# Altium PCB PCB1.PcbDoc
Units mil, origin at the board's own origin, x right, y up, seen from the top; angles counter-clockwise.
Board outline 1968.5 x 2559.06 mil, 6 copper layers (Top Layer, Gnd, Signal_1, Signal_2, Power, Bottom Layer), stack 32.112 mil thick; 113 components, 62 nets, 306 pads, 0 vias.
Unrouted connection lines stored in the file: 217.
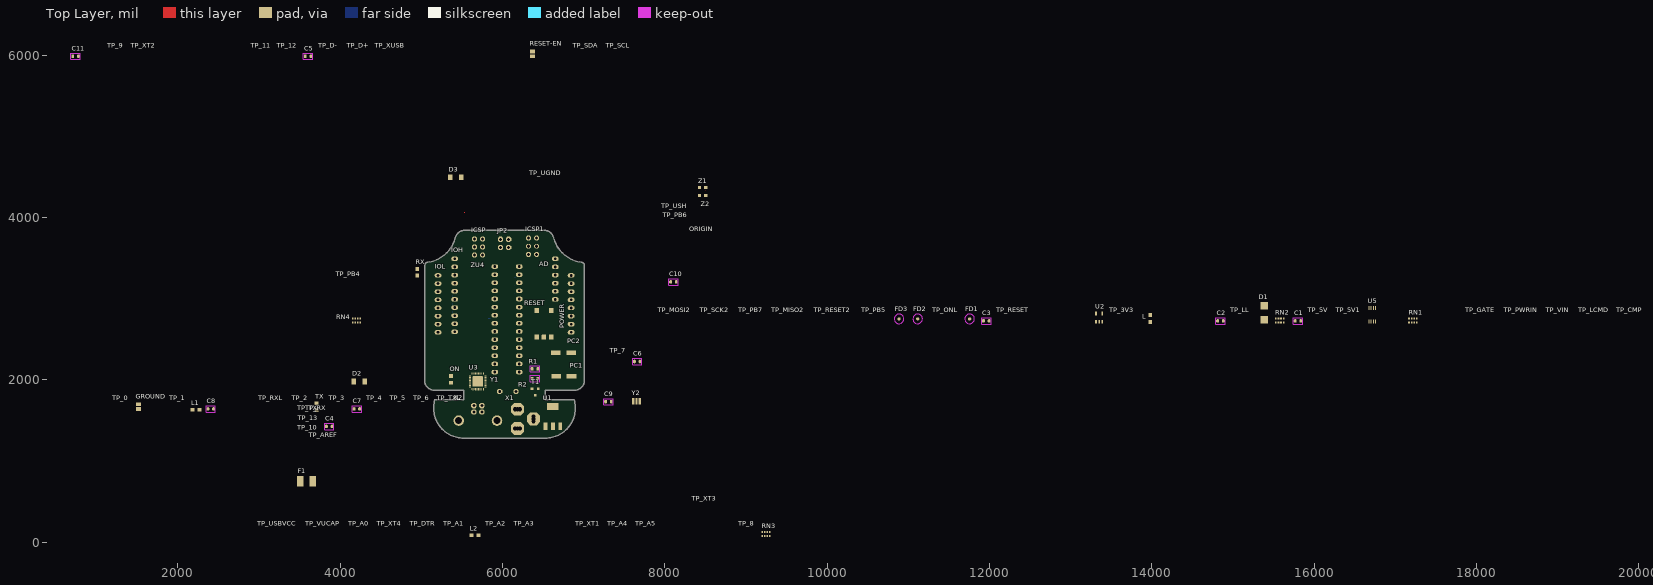
[diagram p0: Top Layer view]
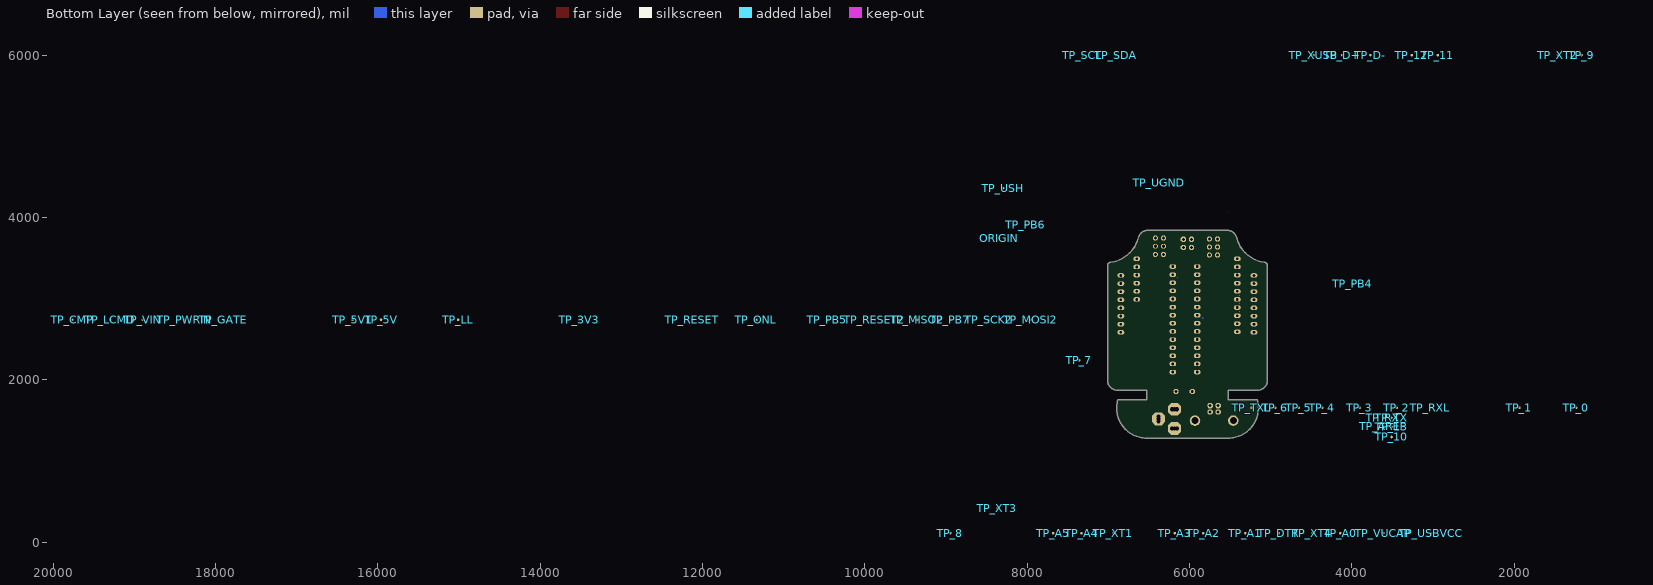
[diagram p1: Bottom Layer view, seen from below]
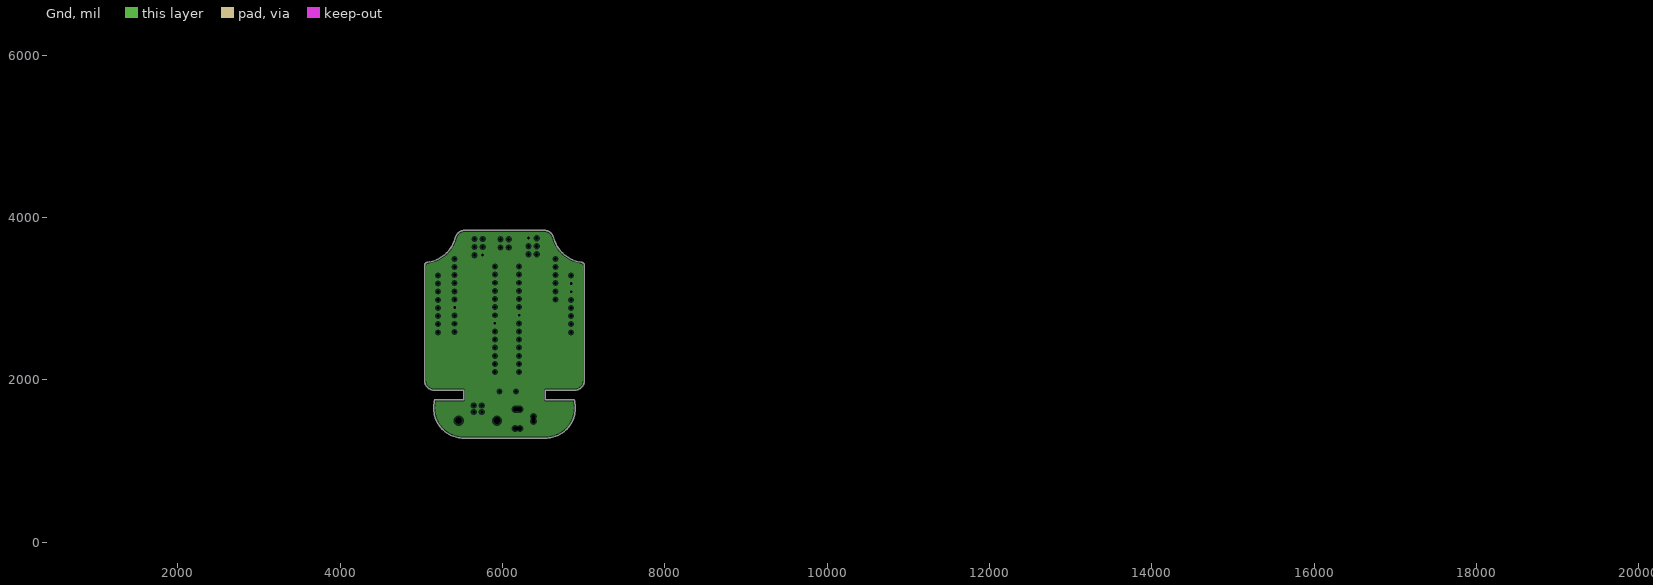
[diagram p2: Gnd, clearances drawn from the general rule]
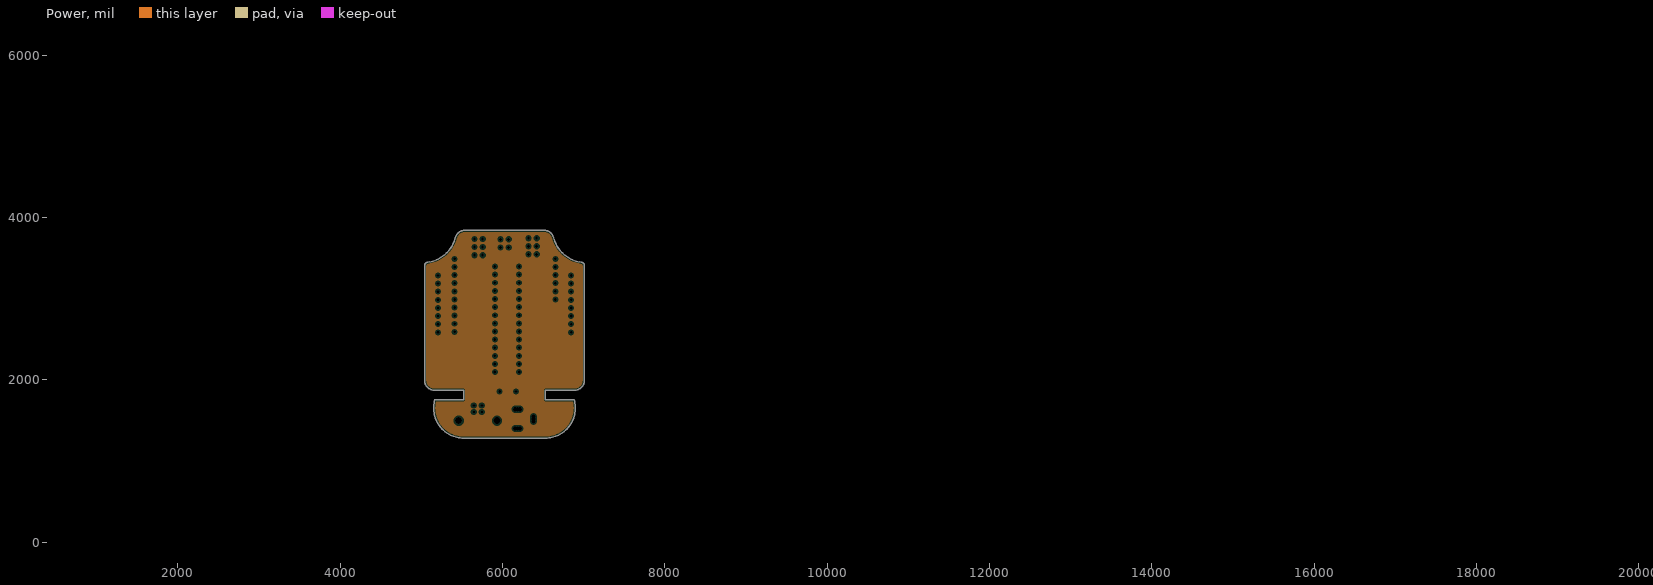
[diagram p3: Power, clearances drawn from the general rule]

## Layer stack, top to bottom
Top Solder: solder mask 0.4, Solder Resist, Dk 3.5
Top Layer: signal copper 1.4
Dielectric 2: prepreg 2.8, PP-006, Dk 4.1
Gnd: plane copper 1.378, net GND
Dielectric 4: prepreg 2.8, PP-006, Dk 4.1
Signal_1: signal copper 1.378
Dielectric 1: dielectric 12.6, FR-4, Dk 4.8
Signal_2: signal copper 1.378
Dielectric 5: prepreg 2.8, PP-006, Dk 4.1
Power: plane copper 1.378
Dielectric 3: prepreg 2.8, PP-006, Dk 4.1
Bottom Layer: signal copper 1.4
Bottom Solder: solder mask 0.4, Solder Resist, Dk 3.5

## Board outline
5519.83,1754.15 5519.83,1872.26 5157.97,1872.26 cw(c5157.97,1990.37) 5039.86,1990.37 5039.86,3407.69 cw(c5079.23,3407.69) 5079.23,3447.06 ccw(c5017.47,3858.94) 5420.19,3752.76 cw(c5534.4,3722.65) 5534.4,3840.76 6513.82,3840.76 cw(c6513.82,3722.65) 6628.02,3752.76 ccw(c7030.75,3858.94) 6968.99,3447.06 cw(c6968.99,3407.69) 7008.36,3407.69 7008.36,1990.37 cw(c6890.25,1990.37) 6890.25,1872.26 6528.39,1872.26 6528.39,1754.15 6882.72,1754.15 cw(c6528.39,1650.8) 6528.39,1281.71 5519.83,1281.71 cw(c5519.83,1650.8) 5165.5,1754.15

## Design rules (kind name [scope] priority, off if disabled: settings)
Clearance [All] p1 off: gap=10 ignorepadtopadclearanceinfootprint=FALSE
PlaneClearance [All] p1: clearance=20
PlaneConnect [All] p1: planeconnectstyle=Relief reliefexpansion=20 reliefentries=4 reliefconductorwidth=10 reliefairgap=10
PolygonConnect [All] p1: connectstyle=Relief reliefconductorwidth=10 reliefentries=4 polygonreliefangle="90 Angle" airgapwidth=10
RoutingVias [All] p1: holewidth=28 width=50 viastyle="Through Hole" minholewidth=28 minwidth=50 maxholewidth=28 maxwidth=50
SolderMaskExpansion [All] p1: expansion=4 istentingtop=FALSE
SupplyNets "Schematic Supply Nets_1" [InNet('+5V')] p1: voltage=0.000
SupplyNets "Schematic Supply Nets" [InNet('GND')] p2: voltage=0.000
Width [All] p1: maxlimit=10 minlimit=10 preferedwidth=10
28 further rules are at their usual default settings.

## Components (designator, comment, footprint, x,y, rotation, side; value= is the part's Value field where it differs from the comment)
AD "6x1F-H8.5" 1X06 6650,3240 r270 top
C1 "100n" C0603-ROUND 15800,2725 r0 top
C2 "100n" C0603-ROUND 14845,2725 r0 top
C3 "1u" C0603-ROUND 11960,2725 r0 top
C4 "100n" C0603-ROUND 3865,1425 r180 top
C5 "100n" C0603-ROUND 3605,5985 r0 top
C6 "100n" C0603-ROUND 7660,2225 r0 top
C7 "100n" C0603-ROUND 4205,1640 r0 top
C8 "1u" C0603-ROUND 2405,1640 r0 top
C9 "22p" C0603-ROUND 7305,1730 r0 top
C10 "100n" C0603-ROUND 8105,3205 r0 top
C11 "22p" C0603-ROUND 740,5985 r0 top
D1 "M7" SMB 15385,2825 r90 top
D2 "CD1206-S01575" MINIMELF 4235,1980 r0 top
D3 "CD1206-S01575" MINIMELF 5425,4495 r0 top
F1 "MF-MSMF050-2 500mA" L1812 3585,750 r0 top
FD1 "FIDUCIALMOUNT" FIDUCIA-MOUNT 11755,2750 r0 top
FD2 "FIDUCIALMOUNT" FIDUCIA-MOUNT 11115,2750 r0 top
FD3 "FIDUCIALMOUNT" FIDUCIA-MOUNT 10885,2750 r0 top
GROUND "SJ" SJ 1515,1670 r90 top
ICSP "3x2 M" 2X03 5705,3635 r270 top
ICSP1 "3x2 M" 2X03 6370,3645 r90 top
IOH "10x1F-H8.5" 1X10 5410,3040 r270 top
IOL "8x1F-H8.5" 1X08 5205,2935 r90 top
JP2 "2x2 M - NM" 2X02 6025,3680 r0 top
L "YELLOW" CHIP-LED0805 13980,2755 r0 top
L1 "BLM21" 0805 2225,1630 r0 top
L2 "10uH" 0805 5660,85 r0 top
ON "GREEN" CHIP-LED0805 5365,2005 r0 top
ORIGIN "TP_SP" TP-SP 8341.63,3745.71 r90 top
PC1 "47u" PANASONIC_D 6755,2045 r0 top
PC2 "47u" PANASONIC_D 6750,2330 r0 top
POWER "8x1F-H8.5" 1X08 6845,2935 r90 top
R1 "1M" R0603-ROUND 6400,2135 r0 top
R2 "1M" R0603-ROUND 6400,2015 r0 top
RESET "TS42031-160R-TR-7260" TS42 6510,2690 r90 top
RESET-EN "SJ" SJ 6370,6015 r90 top
RN1 "10K" CAY16 17215,2730 r0 top
RN2 "1K" CAY16 15575,2730 r0 top
RN3 "22R" CAY16 9245,100 r0 top
RN4 "1K" CAY16 4200,2730 r0 top
RX "YELLOW" CHIP-LED0805 4950,3325 r0 top
T1 "FDN340P" SOT-23 6400,1850 r0 top
TP_0 "TP_SP" TP-SP 1235,1655 r90 top
TP_1 "TP_SP" TP-SP 1935,1655 r90 top
TP_2 "TP_SP" TP-SP 3445,1655 r90 top
TP_3 "TP_SP" TP-SP 3905,1655 r90 top
TP_3V3 "TP_SP" TP-SP 13515,2740 r90 top
TP_4 "TP_SP" TP-SP 4365,1655 r90 top
TP_5 "TP_SP" TP-SP 4655,1655 r90 top
TP_5V "TP_SP" TP-SP 15960,2740 r90 top
TP_5V1 "TP_SP" TP-SP 16310,2740 r90 top
TP_6 "TP_SP" TP-SP 4945,1655 r90 top
TP_7 "TP_SP" TP-SP 7360,2240 r90 top
TP_8 "TP_SP" TP-SP 8945,110 r90 top
TP_9 "TP_SP" TP-SP 1170,6000 r90 top
TP_10 "TP_SP" TP-SP 3510,1295 r90 top
TP_11 "TP_SP" TP-SP 2940,6000 r90 top
TP_12 "TP_SP" TP-SP 3260,6000 r90 top
TP_13 "TP_SP" TP-SP 3510,1420 r90 top
TP_A0 "TP_SP" TP-SP 4140,110 r90 top
TP_A1 "TP_SP" TP-SP 5310,110 r90 top
TP_A2 "TP_SP" TP-SP 5830,110 r90 top
TP_A3 "TP_SP" TP-SP 6180,110 r90 top
TP_A4 "TP_SP" TP-SP 7330,110 r90 top
TP_A5 "TP_SP" TP-SP 7680,110 r90 top
TP_AREF "TP_SP" TP-SP 3610,1425 r90 top
TP_CMP "TP_SP" TP-SP 19765,2740 r90 top
TP_D+ "TP_SP" TP-SP 4120,6000 r90 top
TP_D- "TP_SP" TP-SP 3770,6000 r90 top
TP_DTR "TP_SP" TP-SP 4900,110 r90 top
TP_GATE "TP_SP" TP-SP 17905,2740 r90 top
TP_LCMD "TP_SP" TP-SP 19295,2740 r90 top
TP_LL "TP_SP" TP-SP 15010,2740 r90 top
TP_MISO2 "TP_SP" TP-SP 9355,2740 r90 top
TP_MOSI2 "TP_SP" TP-SP 7955,2740 r90 top
TP_ONL "TP_SP" TP-SP 11335,2740 r90 top
TP_PB4 "TP_SP" TP-SP 3990,3185 r90 top
TP_PB5 "TP_SP" TP-SP 10460,2740 r90 top
TP_PB6 "TP_SP" TP-SP 8014,3910.09 r90 top
TP_PB7 "TP_SP" TP-SP 8945,2740 r90 top
TP_PWRIN "TP_SP" TP-SP 18375,2740 r90 top
TP_RESET "TP_SP" TP-SP 12125,2740 r90 top
TP_RESET2 "TP_SP" TP-SP 9875,2740 r90 top
TP_RX "TP_SP" TP-SP 3610,1530 r90 top
TP_RXL "TP_SP" TP-SP 3035,1655 r90 top
TP_SCK2 "TP_SP" TP-SP 8475,2740 r90 top
TP_SCL "TP_SP" TP-SP 7315,6000 r90 top
TP_SDA "TP_SP" TP-SP 6905,6000 r90 top
TP_TX "TP_SP" TP-SP 3510,1530 r90 top
TP_TXL "TP_SP" TP-SP 5235,1655 r90 top
TP_UGND "TP_SP" TP-SP 6375,4430 r90 top
TP_USBVCC "TP_SP" TP-SP 3020,110 r90 top
TP_USH "TP_SP" TP-SP 8295,4360 r90 top
TP_VIN "TP_SP" TP-SP 18895,2740 r90 top
TP_VUCAP "TP_SP" TP-SP 3610,110 r90 top
TP_XT1 "TP_SP" TP-SP 6940,110 r90 top
TP_XT2 "TP_SP" TP-SP 1460,6000 r90 top
TP_XT3 "TP_SP" TP-SP 8370,415 r90 top
TP_XT4 "TP_SP" TP-SP 4490,110 r90 top
TP_XUSB "TP_SP" TP-SP 4470,6000 r90 top
TX "YELLOW" CHIP-LED0805 3710,1670 r0 top
U1 "NCP1117ST50T3G" SOT223 6620,1550 r0 top
U2 "LP2985-33DBVR" SOT23-DBV 13350,2765 r0 top
U3 "ATMEGA16U2-MU(R)" MLF32 5695,1980 r0 top
U5 "LMV358IDGKR" MSOP08 16715,2800 r0 top
X1 "POWERSUPPLY_DC21MMX" POWERSUPPLY_DC-21MM 6182,1386 r180 top
X2 "USB-B_TH" PN61729 5695.79,1496.61 r0 top
Y1 "16MHz" QS 6065,1855 r180 top
Y2 "CSTCE16M0V53-R0 16MHZ" RESONATOR 7650,1735 r0 top
Z1 "CG0603MLC-05E" CT/CN0603 8465,4370 r180 top
Z2 "CG0603MLC-05E" CT/CN0603 8464.37,4270 r180 top
ZU4 "ATMEGA328P-PU" DIL28-3 6055,2745 r90 top

## Footprints (in the part's own frame and the unit in brackets; to place one, negate y for a bottom-side part, rotate by r counter-clockwise, add the part's x,y. Pads: shape width x height; smd on the part's side, far side on the other; paste and mask are expansions set on the pad)
1X06 [mil] "1X06"
  oval 56x84 / inner round 0 / far side oval 56x84 hole 33.46: 1(-250,0) 2(-150,0) 3(-50,0) 4(50,0) 5(150,0) 6(250,0)
1X08 [mil] "1X08"
  oval 56x84 / inner round 0 / far side oval 56x84 hole 33.46: 1(-350,0) 2(-250,0) 3(-150,0) 4(-50,0) 5(50,0) 6(150,0) 7(250,0) 8(350,0)
1X10 [mil] "1X10"
  oval 56x84 / inner round 0 / far side oval 56x84 hole 33.46: 1(-450,0) 2(-350,0) 3(-250,0) 4(-150,0) 5(-50,0) 6(50,0) 7(150,0) 8(250,0) 9(350,0) 10(450,0)
2X02 [mil] "2X02"
  oct 66x66 / inner round 0 / far side oct 66x66 hole 37.4: 1(-50,-50) 2(-50,50) 3(50,-50) 4(50,50)
2X03 [mil] "2X03"
  oct 61.02x61.02 / inner round 0 / far side oct 61.02x61.02 hole 37.4: 1(-100,-50) 2(-100,50) 3(0,-50) 4(0,50) 5(100,-50) 6(100,50)
0805 [mm] "0805"
  rrect5% 1.2x1 smd: 1(-1.1,0) 2(1.1,0)
C0603-ROUND [mil] "C0603-ROUND"
  rrect80% 35.37x43.31 smd: 1(-35,0) 2(35,0)
  Top Layer keep-out lines w2: -57.99,-38.7 -57.99,38.7 57.99,38.7 57.99,-38.7 -57.99,-38.7
CAY16 [mm] "CAY16"
  rrect10% 0.5x0.65 smd: 1(-1.2,-0.675) 2(-0.4,-0.675) 3(0.4,-0.675) 4(1.2,-0.675) 5(1.2,0.675) 6(0.4,0.675) 7(-0.4,0.675) 8(-1.2,0.675)
CHIP-LED0805 [mil] "CHIP-LED0805"
  rrect4% 47.24x47.24 smd: A(0,-41.34) C(0,41.34)
CT/CN0603 [mm] "CT/CN0603"
  rrect5% 1x1 smd: 1(-1,0) 2(1,0)
DIL28-3 [mil] "DIL28-3"
  oval 56x84 / inner round 0 / far side oval 56x84 hole 33.46: 1(-650,-150) 2(-550,-150) 3(-450,-150) 4(-350,-150) 5(-250,-150) 6(-150,-150) 7(-50,-150) 8(50,-150) 9(150,-150) 10(250,-150) 11(350,-150) 12(450,-150) 13(550,-150) 14(650,-150) 15(650,150) 16(550,150) 17(450,150) 18(350,150) 19(250,150) 20(150,150) 21(50,150) 22(-50,150) 23(-150,150) 24(-250,150) 25(-350,150) 26(-450,150) 27(-550,150) 28(-650,150)
FIDUCIA-MOUNT [mil] "FIDUCIA-MOUNT"
  rrect100% 40x40 smd: P$1(0,0)
  Top Layer keep-out circle w5: c0,0 r59.06
L1812 [mil] "L1812"
  rrect2% 74.8x133.86 smd: 1(-76.77,0) 2(76.77,0)
MINIMELF [mil] "MINIMELF"
  rrect3% 55.12x70.87 smd: A(66.93,0) C(-66.93,0)
MLF32 [mil] "MLF32"
  rrect80% 27.56x11.02 smd: 1(-96.46,68.9) 2(-96.46,49.21) 3(-96.46,29.53) 4(-96.46,9.84) 5(-96.46,-9.84) 6(-96.46,-29.53) 7(-96.46,-49.21) 8(-96.46,-68.9) 17(96.46,-68.9) 18(96.46,-49.21) 19(96.46,-29.53) 20(96.46,-9.84) 21(96.46,9.84) 22(96.46,29.53) 23(96.46,49.21) 24(96.46,68.9)
  rrect80% 11.02x27.56 smd: 9(-68.9,-96.46) 10(-49.21,-96.46) 11(-29.53,-96.46) 12(-9.84,-96.46) 13(9.84,-96.46) 14(29.53,-96.46) 15(49.21,-96.46) 16(68.9,-96.46) 25(68.9,96.46) 26(49.21,96.46) 27(29.53,96.46) 28(9.84,96.46) 29(-9.84,96.46) 30(-29.53,96.46) 31(-49.21,96.46) 32(-68.9,96.46)
  rrect15% 128.11x128.11 smd paste+0 mask+0: 33(0,0)
MSOP08 [mil] "MSOP08"
  rrect16% 11.81x47.24 smd: 1(-38.43,-83.19) 2(-12.83,-83.19) 3(12.76,-83.19) 4(38.35,-83.19) 5(38.35,83.15) 6(12.76,83.15) 7(-12.83,83.15) 8(-38.43,83.15)
PANASONIC_D [mm] "PANASONIC_D"
  rrect3% 3x1.4 smd: +(2.4,0) -(-2.4,0)
PN61729 [mil] "PN61729"
  oct 66x66 / inner round 0 / far side oct 66x66 hole 37.4: 1(49.21,185.43) 2(-49.21,185.43) 3(-49.21,106.69) 4(49.21,106.69)
  round 129.91 / inner round 0 / far side round 129.91 hole 86.61: P$1(-236.22,0) P$2(236.22,0)
POWERSUPPLY_DC-21MM [mil] "POWERSUPPLY_DC-21MM"
  oct 157.48x157.48 / inner round 0 / far side oct 157.48x157.48 hole 51.18: 1(-200,-132) 2(-3,-250) 3(-3,-14)
  round 76.77 / inner round 0 / far side round 76.77 hole 51.18: 4(-200,-162) 5(-200,-102) 6(-33,-14) 7(27,-14) 8(-33,-250) 9(27,-250)
QS [mil] "QS"
  oct 66x66 / inner round 0 / far side oct 66x66 hole 33.46: 1(-100,0) 2(100,0)
R0603-ROUND [mil] "R0603-ROUND"
  rrect80% 35.37x43.31 smd: 1(-35,0) 2(35,0)
  Top Layer keep-out lines w2: -57.99,-38.7 57.99,-38.7 57.99,38.7 -57.99,38.7 -57.99,-38.7
RESONATOR [mm] "RESONATOR"
  rrect7% 0.7x2 smd: 1(-1,0) 2(0,0) 3(1,0)
SJ [mil] "SJ"
  rrect4% 46x63 smd: 1(-30,0) 2(30,0)
SMB [mil] "SMB"
  rrect2% 94.49x94.49 smd: A(86.61,0) C(-86.61,0)
SOT23-DBV [mil] "SOT23-DBV"
  rrect9% 21.65x47.24 smd: 1(-37.4,-51.18) 2(0,-51.18) 3(37.4,-51.18) 4(37.4,51.18) 5(-37.4,51.18)
SOT223 [mil] "SOT223"
  rrect4% 48x88 smd: 1(-91,-122) 2(0,-122) 3(91,-122)
  rrect2% 141.73x86.61 smd: 4(0,122.01)
SOT-23 [mil] "SOT-23"
  rrect6% 31x35 smd: 1(1,-40) 2(-37,40) 3(39,40)
TP-SP [mil] "TP-SP"
  rrect100% 31.5x31.5 smd far side paste+0: X(0,0)
TS42 [mil] "TS42"
  rrect15% 62.99x55.12 smd: 1(-165.35,88.58) 2(165.35,88.58) 3(-165.35,-88.58) 4(165.35,-88.58)
  rrect15% 62.99x55.12 smd paste+0: 5(-165.35,0)

## Part data
AD: library part PINHD-1X6, "PIN HEADER", DeviceSetName=PINHD-1X6, GateName_1=A, LibraryName=SmartPrj, SymbolName_1=PINHD6
C1 C2 C3 C4 C5 C6 C7 C8 C9 C10 C11: library part C-EU0603-RND, "CAPACITOR, European symbol", DeviceName=0603-RND, DeviceSetName=C-EU, GateName_1=G$1, LibraryName=SmartPrj, SymbolName_1=C-EU
D1: library part DIODE-SMB, "DIODE", DeviceName=SMB, DeviceSetName=DIODE-, GateName_1=G$1, LibraryName=diode, SymbolName_1=D
D2 D3: library part DIODE-MINIMELF, "DIODE", DeviceName=MINIMELF, DeviceSetName=DIODE-, GateName_1=G$1, LibraryName=diode, SymbolName_1=D
F1: library part L-EUL1812, "INDUCTOR, European symbol", DeviceName=L1812, DeviceSetName=L-EU, GateName_1=G$1, LibraryName=rcl, SymbolName_1=L-EU
GROUND RESET-EN: "SMD solder JUMPER", DeviceSetName=SJ, GateName_1=1, LibraryName=jumper, SymbolName_1=SJ
ICSP ICSP1: library part PINHD-2X3, "PIN HEADER", DeviceSetName=PINHD-2X3, GateName_1=A, LibraryName=SmartPrj, SymbolName_1=PINH2X3
IOH: library part PINHD-1X10_ARD, "PIN HEADER", DeviceSetName=PINHD-1X10_ARD, GateName_1=A, LibraryName=SmartPrj, SymbolName_1=PINHD10
IOL POWER: library part PINHD-1X8, "PIN HEADER", DeviceSetName=PINHD-1X8, GateName_1=A, LibraryName=SmartPrj, SymbolName_1=PINHD8
JP2: library part PINHD-2X2, "PIN HEADER", DeviceSetName=PINHD-2X2, GateName_1=A, LibraryName=SmartPrj, SymbolName_1=PINH2X2
L ON RX TX: library part LEDCHIP-LED0805, "LED   OSRAM: - CHIPLED LG R971, LG N971, LY N971, LG Q971, LY Q971, LO R971, LY R971 LH N974, LH R974 LS Q976, LO Q976, LY Q976 LO Q996 - Hyper CHIPLED LW Q18S LB Q993, LB Q99A, LB R99A - SideLED LS A670, LO A670, LY A670, LG A670, LP A670 LB A673, LV A673, LT A673, LW A673 LH A674 LY A675 LS A676, LA A676, LO A676, LY A676, LW A676 LS A679, LY A679, LG A679 -  Hyper Micro SIDELEDÂ® LS Y876, LA Y876, LO Y876, LY Y876 LT Y87S - SmartLED LW L88C, LW L88S LB L89C, LB L89S, LG L890 LS L89K, LO L89K, LY L89K LS L896, LA L896, LO L896, LY L896 - TOPLED LS T670, LO T670, LY T670, LG T670, LP T670 LSG T670, LSP T670, LSY T670, LOP T670, LYG T670 LG T671, LOG T671, LSG T671 LB T673, LV T673, LT T673, LW T673 LH T674 LS T676, LA T676, LO T676, LY T676, LB T676, LH T676, LSB T676, LW T676 LB T67C, LV T67C, LT T67C, LS T67K, LO T67K, LY T67K, LW E67C LS E67B, LA E67B, LO E67B, LY E67B, LB E67C, LV E67C, LT E67C LW T67C LS T679, LY T679, LG T679 LS T770, LO T770, LY T770, LG T770, LP T770 LB T773, LV T773, LT T773, LW T773 LH T774 LS E675, LA E675, LY E675, LS T675 LS T776, LA T776, LO T776, LY T776, LB T776 LHGB T686 LT T68C, LB T68C - Hyper Mini TOPLEDÂ® LB M676 - Mini TOPLED SantanaÂ® LG M470 LS M47K, LO M47K, LY M47K    Source: http://www.osram.convergy.de   LUXEON: - LUMILEDÂ® LXK2-PW12-R00, LXK2-PW12-S00, LXK2-PW14-U00, LXK2-PW14-V00 LXK2-PM12-R00, LXK2-PM12-S00, LXK2-PM14-U00 LXK2-PE12-Q00, LXK2-PE12-R00, LXK2-PE12-S00, LXK2-PE14-T00, LXK2-PE14-U00 LXK2-PB12-K00, LXK2-PB12-L00, LXK2-PB12-M00, LXK2-PB14-N00, LXK2-PB14-P00, LXK2-PB14-Q00 LXK2-PR12-L00, LXK2-PR12-M00, LXK2-PR14-Q00, LXK2-PR14-R00 LXK2-PD12-Q00, LXK2-PD12-R00, LXK2-PD12-S00 LXK2-PH12-R00, LXK2-PH12-S00 LXK2-PL12-P00, LXK2-PL12-Q00, LXK2-PL12-R00    Source: www.luxeon.com   KINGBRIGHT:   KA-3528ASYC Source: www.kingbright.com", DeviceName=CHIP-LED0805, DeviceSetName=LED, GateName_1=G$1, LibraryName=led, SymbolName_1=LED
L1: library part WE-CBF_0805, "SMD EMI Suppression Ferrite Beads - excellent anti-EMI properties - low DCR - impedances till 3000 ohms - rated current up to 6 A", DeviceName=_0805, DeviceSetName=WE-CBF, GateName_1=G$1, LibraryName=wuerth-elektronik, SymbolName_1=L
L2: library part 0715_CV201210-100K, "10uH 0805", CASE=0805, DeviceSetName=0715_CV201210-100K, GateName_1=G$1, LibraryName=Induttanze, MONTHLY_USAGE=_____, PART_NUMBER=CV201210-100K, PRICE=_____, SUPPLIER=_____, SymbolName_1=L, TYPE=Induttanze
PC1 PC2: library part CPOL-EUD, "POLARIZED CAPACITOR, European symbol", +=+, DeviceName=D, DeviceSetName=CPOL-EU, GateName_1=G$1, LibraryName=rcl, SymbolName_1=CPOL
R1 R2: library part R-EU_R0603, "RESISTOR, European symbol", DeviceName=R0603, DeviceSetName=R-EU_, GateName_1=G$1, LibraryName=SmartPrj, SymbolName_1=R-EU
RESET: library part TS42, "TS42 Dongnan Electronics Tact switch VDC 12V - 50mA", DeviceSetName=TS42, GateName_1=G$1, LibraryName=SmartPrj, SymbolName_1=ST-MOD_V1.4_TS42
RN1 RN2 RN3 RN4: library part 4R-NCAY16, "Array Chip Resistor   Source: RS Component / Phycomp", DeviceName=CAY16, DeviceSetName=4R-N, GateName_1=A, GateName_2=B, GateName_3=C, GateName_4=D, LibraryName=resistor-dil, SymbolName_1=R1NV, SymbolName_2=R1NV, SymbolName_3=R1NV, SymbolName_4=R1NV
T1: library part PMOSSOT23, "MOS FET", DeviceSetName=PMOSSOT23, GateName_1=A, LibraryName=zetex, SymbolName_1=P_MOSFET
U1: library part MC33269ST*, "Adjustable Output Low Dropout Voltage Regulator 800 mA   Source: http://www.onsemi.com/pub/Collateral/MC33269-D.PDF", DeviceSetName=MC33269ST*, GateName_1=G$1, LibraryName=linear, SymbolName_1=VREG-O2
U2: library part LP2985-XXDBVR, "ULTRALOW-POWER 50-mA LOW-DROPOUT LINEAR REGULATORS   50-mA Low-Dropout Regulator Source: http://focus.ti.com/lit/ds/symlink/tps77001.pdf", DeviceSetName=LP2985-XXDBVR, GateName_1=G$1, LibraryName=SmartPrj, SymbolName_1=LP2985-XXDBVR
U3: library part ATMEGA16U2-MU, DeviceName=MU, DeviceSetName=ATMEGA16U2-, GateName_1=G$1, LibraryName=SmartPrj, SymbolName_1=ATMEL_MEGA8U2
U5: library part LMV358?*MM, "Dual General Purpose, Low Voltage, Rail-to-Rail Output Operational Amplifiers   Source: http://www.national.com/mpf/LM/LMV321.html http://www.national.com/dt/lmv_qual.pdf", DeviceName=MM, DeviceSetName=LMV358?*, GateName_1=A, GateName_2=B, GateName_3=P, LibraryName=linear, SymbolName_1=OPAMP, SymbolName_2=OPAMP, SymbolName_3=PWR+-, V+=V+, V-=V-
X2: library part PN61729, "BERG USB connector", DeviceSetName=PN61729, GateName_1=G$1, LibraryName=SmartPrj, SymbolName_1=J11, USB=USB
Y1: library part XTAL/S, "CRYSTAL", DeviceSetName=XTAL/S, GateName_1=G$1, LibraryName=SmartPrj, SymbolName_1=XTAL
Y2: library part RESONATORMU, DeviceName=MU, DeviceSetName=RESONATOR, GateName_1=G$1, LibraryName=SmartPrj, SymbolName_1=RESONATOR
Z1 Z2: library part VARISTORCN0603, "VARISTOR", DeviceName=CN0603, DeviceSetName=VARISTOR, GateName_1=G$1, LibraryName=varistor, SymbolName_1=VARISTOR
ZU4: "MICROCONTROLLER   4 Kbytes FLASH   128 bytes SRAM   256 bytes EEPROM   UART   6-channel 10 bit ADC", DeviceName=PU, DeviceSetName=ATMEGA328P-, GateName_1=G$1, LibraryName=SmartPrj, SymbolName_1=20-I/O-2
FD1 FD2 FD3: DeviceSetName=FIDUCIALMOUNT, GateName_1=G$1, LibraryName=SmartPrj, SymbolName_1=FIDUCIAL
ORIGIN TP_0 TP_1 TP_2 TP_3 TP_3V3 TP_4 TP_5 TP_5V TP_5V1 TP_6 TP_7 TP_8 TP_9 TP_10 TP_11 TP_12 TP_13 TP_A0 TP_A1 TP_A2 TP_A3 TP_A4 TP_A5 TP_AREF TP_CMP TP_D+ TP_D- TP_DTR TP_GATE TP_LCMD TP_LL TP_MISO2 TP_MOSI2 TP_ONL TP_PB4 TP_PB5 TP_PB6 TP_PB7 TP_PWRIN TP_RESET TP_RESET2 TP_RX TP_RXL TP_SCK2 TP_SCL TP_SDA TP_TX TP_TXL TP_UGND TP_USBVCC TP_USH TP_VIN TP_VUCAP TP_XT1 TP_XT2 TP_XT3 TP_XT4 TP_XUSB: DeviceSetName=TP_SP, GateName_1=G$1, LibraryName=SmartPrj, SymbolName_1=TP-SP
X1: DeviceName=X, DeviceSetName=POWERSUPPLY_DC21MM, GateName_1=G$1, LibraryName=SmartPrj, SymbolName_1=POWERSUPPLY_DC21PWR

## Nets (pads, with @x,y where several pads share a name; then routed paths per layer and width w, separated by ;. In a path a pad name is that pad's centre, name@x,y a point inside that pad or via, vN(x,y) a via of type N, cw(c..) or ccw(c..) an arc to the next point about the centre after c; other vN are vias at no path point)
+3V3: C3.2 POWER.4 TP_3V3.X U2.5 U5.2
+5V: C1.2 C2.2 C6.2 C7.1 D2.C D3.C ICSP1.2 ICSP.2 L2.1 PC2.+ POWER.2 POWER.5 RN1.3 RN1.5 RN2.2 RN2.3 RN4.3 RN4.4 T1.2 TP_5V1.X TP_5V.X U1.2 U1.4 U2.1 U2.3 U3.4 U3.32 U5.8 ZU4.7
AD0: AD.1 TP_A0.X ZU4.23
AD1: AD.2 TP_A1.X ZU4.24
AD2: AD.3 TP_A2.X ZU4.25
AD3: AD.4 TP_A3.X ZU4.26
AD4/SDA: AD.5 IOH.9 TP_A4.X TP_SDA.X ZU4.27
AD5/SCL: AD.6 IOH.10 TP_A5.X TP_SCL.X ZU4.28
AREF: C4.2 IOH.8 TP_AREF.X ZU4.21 | length 29.1
  Top Layer w10: C4.2@3830,1421.03 C4.2
  Bottom Layer w10: 5824.85,2760 5850,2760
AVCC: C10.2 L2.2 ZU4.20
CMP: RN1.1 RN1.2 TP_CMP.X U5.3
D+: RN3.5 TP_D+.X X2.3 Z1.1
D-: RN3.8 TP_D-.X X2.2 Z2.1 | length 0.9
  Top Layer w10: 8503.74,4334.69 8504.37,4335.31
DTR: C5.1 RN2.4 TP_DTR.X U3.13
GATE_CMD: T1.3 TP_GATE.X U5.1
GND: C1.1 C2.1 C3.1 C4.1 C6.1 C7.2 C9.2 C10.1 C11.2 GROUND.1 ICSP1.6 ICSP.6 IOH.7 L.C ON.C PC1.- PC2.- POWER.6 POWER.7 RESET.1 RESET.2 RN1.7 RN2.5 U1.1 U2.2 U3.3 U3.33 U5.4 X1.1 X1.3 Y2.2 ZU4.8 ZU4.22
IO0: IOL.1 RN4.2 TP_0.X ZU4.2
IO1: IOL.2 RN4.1 TP_1.X ZU4.3
IO2: IOL.3 TP_2.X ZU4.4
IO3: IOL.4 TP_3.X ZU4.5
IO4: IOL.5 TP_4.X ZU4.6
IO5: IOL.6 TP_5.X ZU4.11 | length 7.1
  Bottom Layer w10: 5382.5,2837.5 5385,2835 ; 6150,3060 6152.5,3057.5
IO6: IOL.7 TP_6.X ZU4.12 | length 7.1
  Bottom Layer w10: 5382.5,2937.5 5385,2935 ; 6150,3160 6152.5,3157.5
IO7: IOL.8 TP_7.X ZU4.13 | length 7.1
  Bottom Layer w10: 5382.5,3037.5 5385,3035 ; 6150,3260 6152.5,3257.5
IO8: IOH.1 TP_8.X ZU4.14
IO9: IOH.2 TP_9.X ZU4.15
L13: RN2.8 TP_LCMD.X U5.6 U5.7
M8RXD: RN4.7 TP_RX.X U3.9
M8TXD: RN4.8 TP_TX.X U3.8
MISO: ICSP.1 IOH.5 TP_12.X ZU4.18
MISO2: ICSP1.1 TP_MISO2.X U3.17
MOSI: ICSP.4 IOH.4 TP_11.X ZU4.17
MOSI2: ICSP1.4 TP_MOSI2.X U3.16
NetL_A: L.A RN2.1 TP_LL.X
NetON_A: ON.A RN4.5 RN4.6 TP_ONL.X
NetRN2_6: RN2.6 TP_TXL.X TX.A
NetRN2_7: RN2.7 RX.A TP_RXL.X
NetTP_USBVCC_X: TP_USBVCC.X U3.31
PB4: JP2.1 TP_PB4.X U3.18
PB5: JP2.3 TP_PB5.X U3.19
PB6: JP2.2 TP_PB6.X U3.20
PB7: JP2.4 TP_PB7.X U3.21
PWRIN: D1.A TP_PWRIN.X X1.2
RD+: RN3.4 U3.29
RD-: RN3.1 U3.30
RESET: C5.2 D2.A ICSP.5 POWER.3 RESET-EN.1 RESET-EN.2 RESET.3 RESET.4 RN1.4 TP_RESET.X ZU4.1
RESET2: D3.A ICSP1.5 RN1.6 TP_RESET2.X U3.24
RXLED: RX.C U3.10
SCK: ICSP.3 IOH.6 TP_13.X U5.5 ZU4.19
SCK2: ICSP1.3 TP_SCK2.X U3.15
SS: IOH.3 TP_10.X ZU4.16
TP_VUCAP: C8.1 TP_VUCAP.X U3.27
TXLED: TX.C U3.11
UGND: C8.2 GROUND.2 L1.1 TP_UGND.X U3.28 X2.4
USBVCC: F1.1 T1.1
USHIELD: L1.2 TP_USH.X X2.P$1 X2.P$2 Z1.2 Z2.2
VIN: D1.C PC1.+ POWER.8 RN1.8 TP_VIN.X U1.3
XT1: C9.1 R1.1 TP_XT3.X U3.1 Y1.2
XT2: C11.1 R1.2 TP_XT4.X U3.2 Y1.1
XTAL1: R2.1 TP_XT1.X Y2.3 ZU4.9
XTAL2: R2.2 TP_XT2.X Y2.1 ZU4.10
XUSB: F1.2 TP_XUSB.X X2.1
pads on no net: FD1.P$1 FD2.P$1 FD3.P$1 ORIGIN.X POWER.1 RESET.5 RN3.2 RN3.3 RN3.6 RN3.7 U2.4 U3.5 U3.6 U3.7 U3.12 U3.14 U3.22 U3.23 U3.25 U3.26 X1.4 X1.5 X1.6 X1.7 X1.8 X1.9
copper on no net: | length 8.1
  Top Layer w10: 5526.46,4064.53 5534.53,4064.53

## Polygon pours and split planes (outlines as drawn)
GND on Gnd (split plane): 309 vertices, not listed, extent 5059.89,1301.73 6988.33,3820.73
GND on Gnd (split plane): 5439.55,3747.66 5439.54,3747.66
no net on Power (split plane): 309 vertices, not listed, extent 5059.89,1301.73 6988.33,3820.73
no net on Power (split plane): 5439.55,3747.66 5439.54,3747.66

## Silkscreen, mask and mechanical layers (free items; w line width, h text height)
Mechanical 1:
  circle w0.25: c6024.11,3840.76 r0.12
  circle w0.25: c3149.86,3937.26 r0.12
  circle w0.25: c4724.66,5905.76 r0.12
  circle w0.25: c5118.36,3937.26 r0.12
  circle w0.25: c0.25,0.25 r0.12
  circle w0.25: c3543.56,5905.76 r0.12
  circle w0.25: c3149.86,5512.06 r0.12
  circle w0.25: c5118.36,5512.06 r0.12
  circle w0.25: c4523.95,4214.31 r0.12
  circle w0.25: c0.25,590.8 r0.12
  circle w0.25: c1575.05,2559.31 r0.12
  circle w0.25: c0.25,197.1 r0.12
  circle w0.25: c1968.75,590.8 r0.12
  circle w0.25: c1968.75,2165.6 r0.12
  circle w0.25: c0.25,2165.6 r0.12
  circle w0.25: c10.25,65.25 r0.12
  circle w0.25: c0.25,15.25 r0.12
  circle w0.25: c40.25,65.25 r0.12
  circle w0.25: c0.25,5.25 r0.12
  circle w0.25: c50.25,15.25 r0.12
  circle w0.25: c25.25,65.25 r0.12
  circle w0.25: c50.25,55.25 r0.12
  circle w0.25: c0.25,55.25 r0.12
  circle w0.25: c1859.5,5102.45 r0.12
  circle w0.25: c4523.95,4214.31 r0.12
  circle w0.25: c1575.05,2559.31 r0.12
  circle w0.25: c0.25,197.1 r0.12
  circle w0.25: c1968.75,2165.6 r0.12
  circle w0.25: c0.25,2165.6 r0.12
  circle w0.25: c0.25,393.95 r0.12
  circle w0.25: c5683.95,3707.45 r0.12
  circle w0.25: c0.25,0.25 r0.12
  circle w0.25: c1575.05,2362.45 r0.12
  circle w0.25: c1968.75,2362.45 r0.12
  circle w0.25: c0.25,2362.45 r0.12
  lines w0.5: 25.25,15.25 25.25,55.25 ; 5239.83,1884.15 5239.83,2002.26 ; 5519.83,1754.15 5165.5,1754.15 ccw(c5519.83,1650.8) 5519.83,1281.71 6528.39,1281.71 ccw(c6528.39,1650.8) 6882.72,1754.15 6528.39,1754.15 6528.39,1872.26 6890.25,1872.26 ccw(c6890.25,1990.37) 7008.36,1990.37 7008.36,3407.69 ccw(c6968.99,3407.69) 6968.99,3447.06 cw(c7030.75,3858.94) 6628.02,3752.76 ccw(c6513.82,3722.65) 6513.82,3840.76 5534.4,3840.76 ccw(c5534.4,3722.65) 5420.19,3752.76 cw(c5017.47,3858.94) 5079.23,3447.06 ccw(c5079.23,3407.69) 5039.86,3407.69 5039.86,1990.37 ccw(c5157.97,1990.37) 5157.97,1872.26 5519.83,1872.26 ; 0.25,18.25 ccw(c3.25,18.25) 3.25,15.25 12.44,15.25 12.44,12.25 3.44,12.25 ccw(c12.44,9.62) 12.44,0.25 38.06,0.25 ccw(c38.06,9.62) 47.06,12.25 38.06,12.25 38.06,15.25 47.25,15.25 ccw(c47.25,18.25) 50.25,18.25 50.25,54.25 ccw(c49.25,54.25) 49.25,55.25 cw(c50.82,65.71) 40.59,63.01 ccw(c37.69,62.25) 37.69,65.25 12.81,65.25 ccw(c12.81,62.25) 9.91,63.01 cw(c-0.32,65.71) 1.25,55.25 ccw(c1.25,54.25) 0.25,54.25 0.25,18.25

## Text inside footprints (layer, text, board x,y; h text height)
U1: Mechanical 7 "2" at 6569.19,1379.63 h49.6; Mechanical 7 "1" at 6484.07,1380 h49.6; Mechanical 7 "4" at 6695,1650 h49.6; Mechanical 7 "3" at 6660.19,1380 h49.6
U3: Mechanical 7 "1" at 5572.95,2058.74 h49.6